# Altium PCB Radio.PcbDoc (part 2 of 2)
Units mm, origin at the board's own origin, x right, y up, seen from the top; angles counter-clockwise.
Board outline 56.13 x 65.02 mm, 4 copper layers (Top Layer, Internal Plane 1, Internal Plane 2, Bottom Layer), stack 1.516 mm thick; 67 components, 62 nets, 303 pads, 202 vias.
Unrouted connection lines stored in the file: 1.
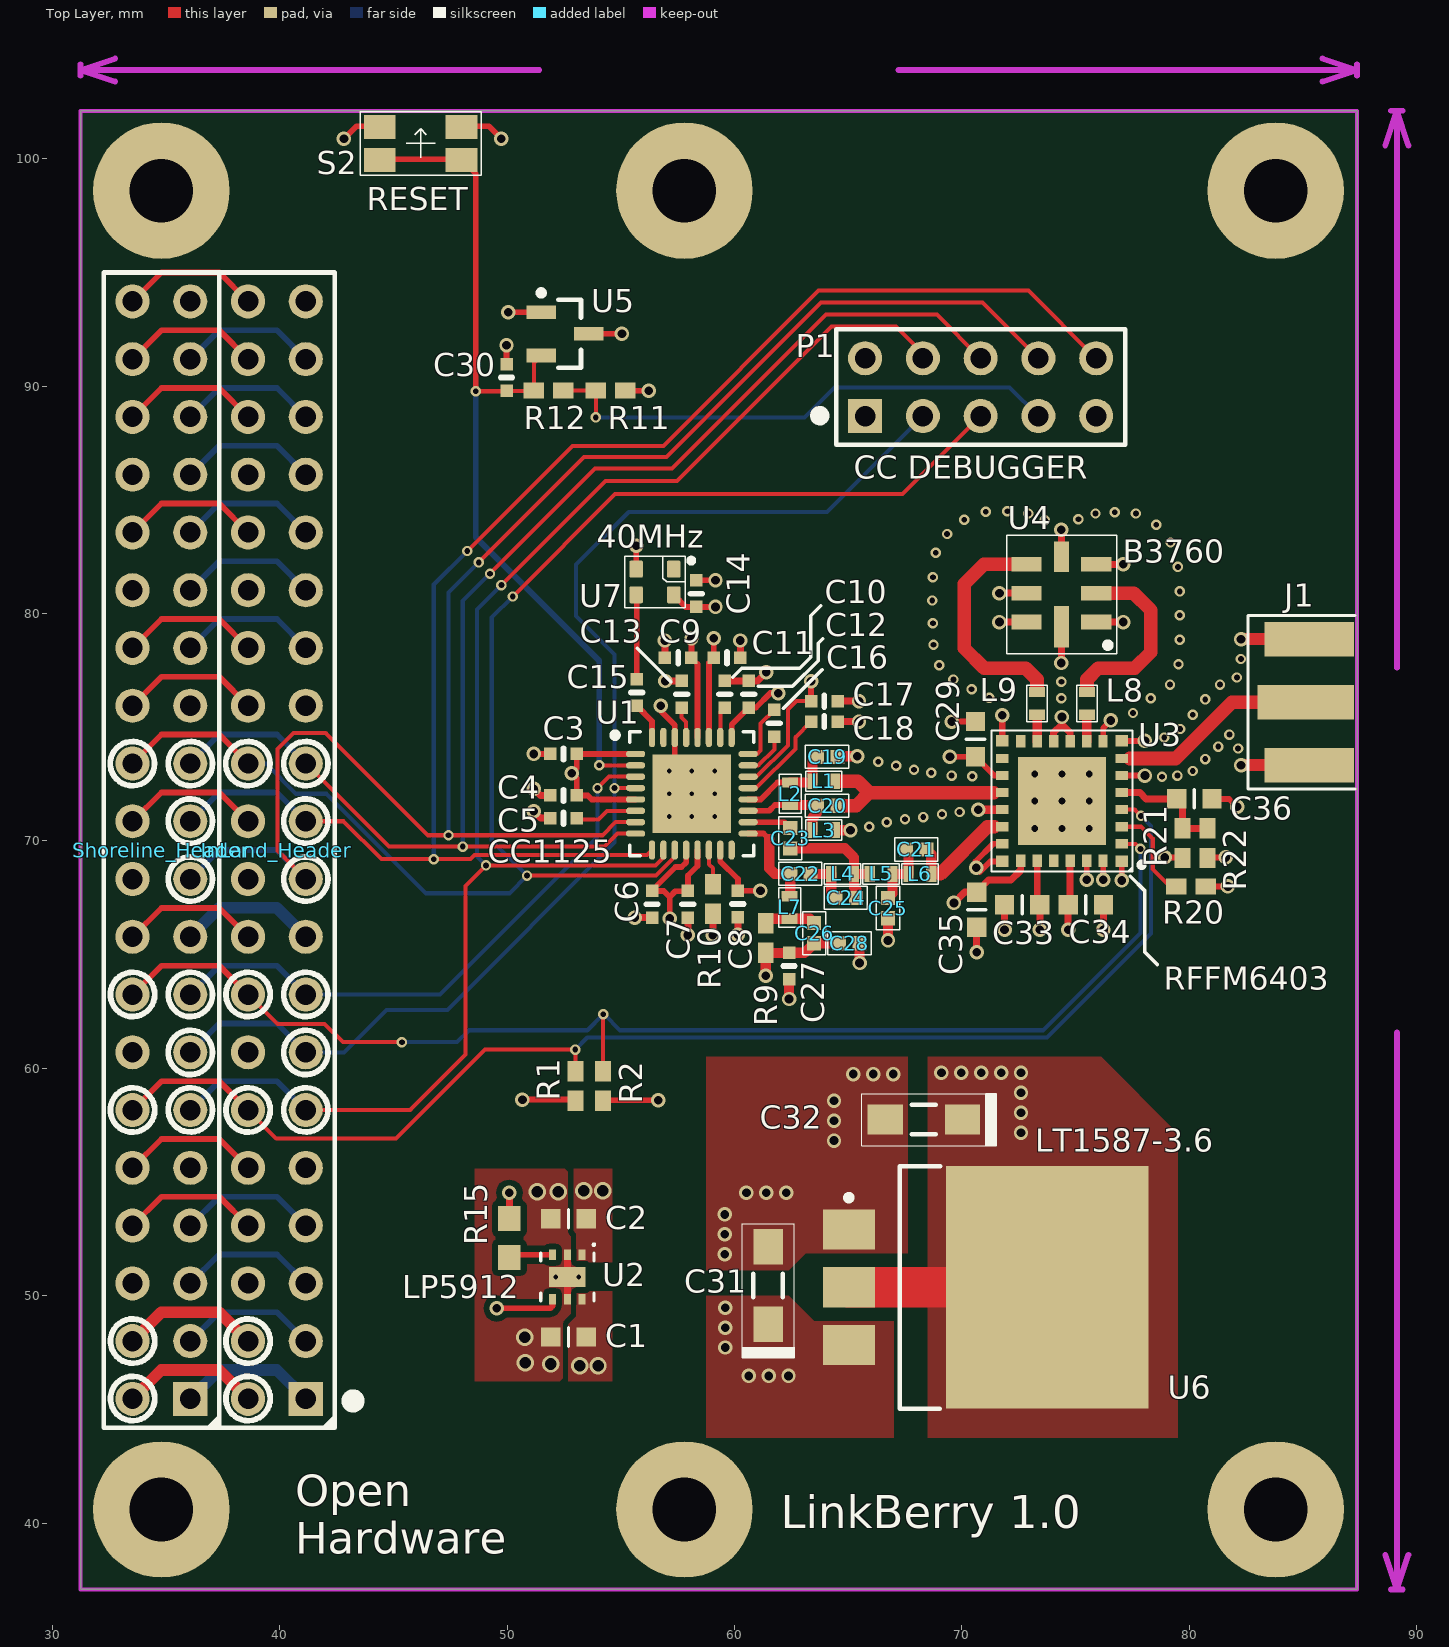
[diagram p0: Top Layer view]

## Silkscreen, mask and mechanical layers (free items; w line width, h text height) (continued)
Cu_to_edge: (continued)
  rectangle: 83.35,72.575 87.375,74.075
  rectangle: 43.7,100.9 45.1,101.95
  rectangle: 47.3,100.9 48.7,101.95
Via_PTH_Rules:
  text "Plate all holes (including vias) which have a hole size below 100mil. / Do not plate holes which are above 200mil." at 95.15,92.175 h1.37